# Altium PCB acqboard 3.0.PcbDoc (part 3 of 4)
Units mil, origin at the board's own origin, x right, y up, seen from the top; angles counter-clockwise.
Board outline 6000 x 4000 mil, 4 copper layers (Top Layer, Internal Plane 1, Internal Plane 2, Bottom Layer); 450 components, 328 nets, 1980 pads, 745 vias.
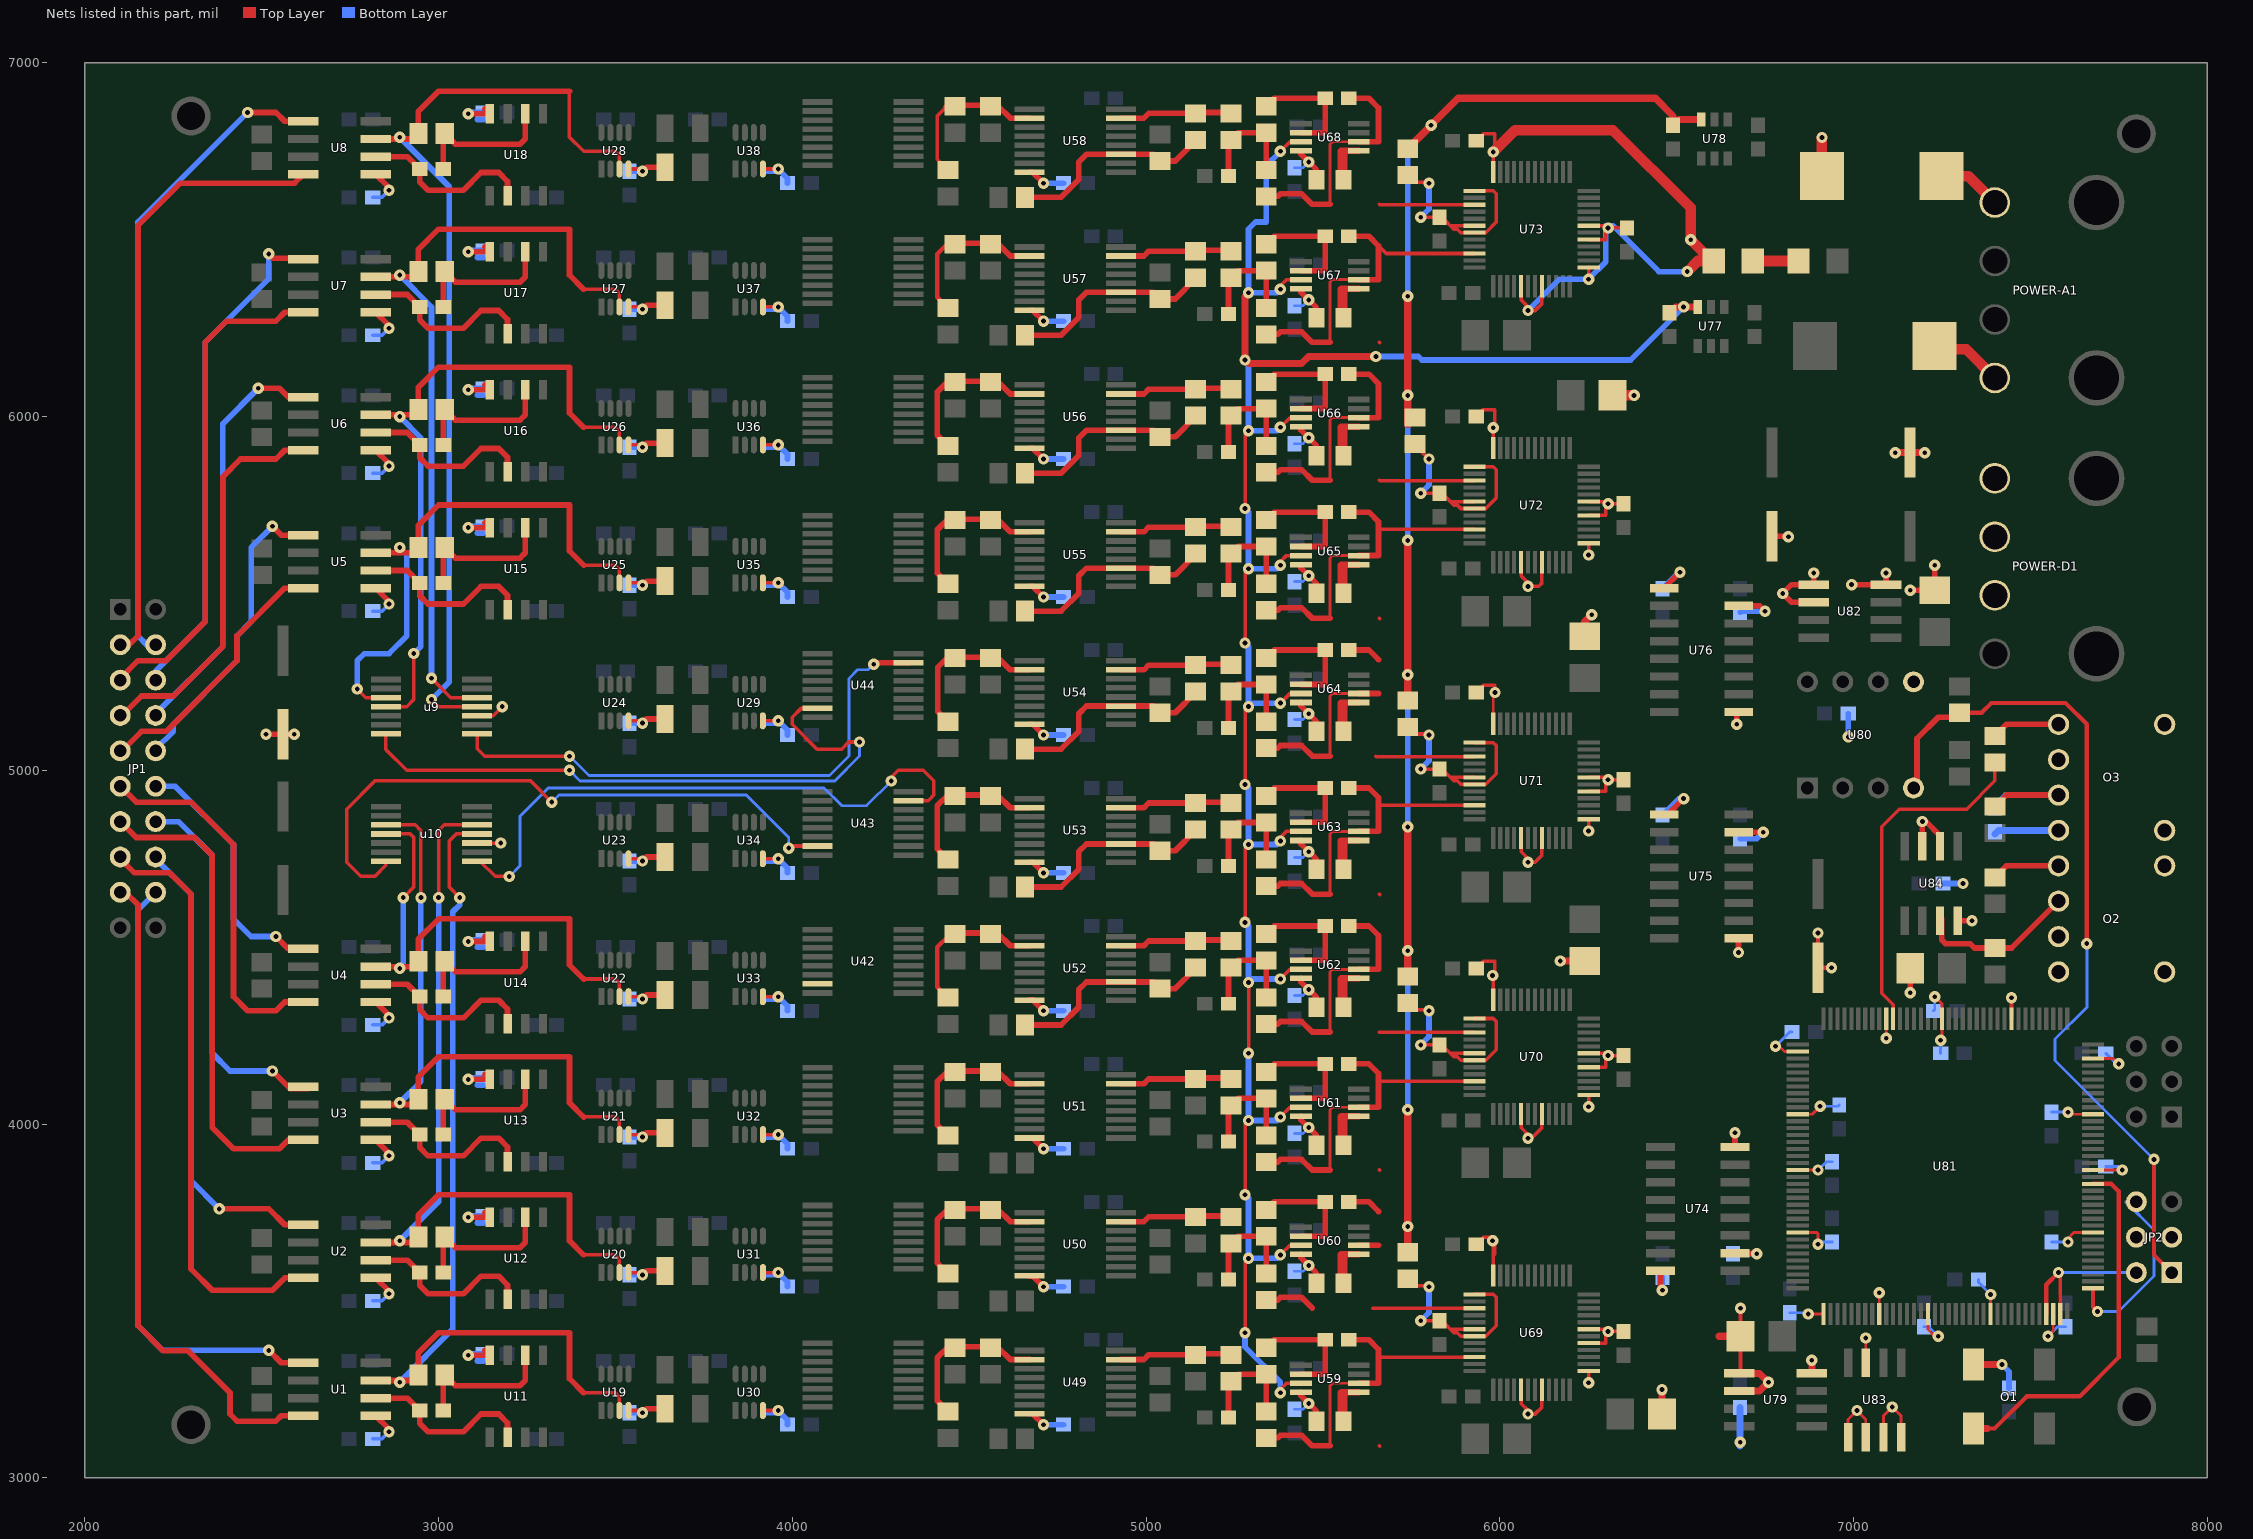
[diagram p5: the nets of this part, all layers, seen from the top]

## Via types
v1: diameter 32, hole 13.5, Top Layer to Bottom Layer, 745 vias

## Nets (pads, with @x,y where several pads share a name; then routed paths per layer and width w, separated by ;. In a path a pad name is that pad's centre, name@x,y a point inside that pad or via, vN(x,y) a via of type N, cw(c..) or ccw(c..) an arc to the next point about the centre after c; other vN are vias at no path point) (continued)
AVSS: C2.2 C11.2 C12.2 C13.2 C14.2 C15.2 C16.2 C17.2 C18.2 C19.2 C20.2 C41.2 C43.2 C45.2 C47.2 C49.2 C51.2 C53.2 C55.2 C57.2 C59.2 C100.1 C102.1 C104.1 C106.1 C108.1 C110.1 C112.1 C114.1 C116.1 C117.1 C118.1 C119.1 C120.1 C121.1 C122.1 C123.1 C142.2 C143.2 C144.2 C145.2 C146.2 C147.2 C148.2 C149.2 C150.2 C151.2 C162.1 C163.1 C164.1 C165.1 C166.1 C167.1 C168.1 C169.1 C170.1 C171.1 C172.2 C173.2 C174.2 C175.2 C176.2 C177.2 C178.2 C179.2 C180.2 C181.2 C192.2 C194.2 C196.2 C198.2 C200.2 C202.2 C204.2 C206.2 C208.2 C210.2 L3.2 U1.5 U2.5 U3.5 U4.5 U5.5 U6.5 U7.5 U8.5 u9.3 u10.3 U11.4 U12.4 U13.4 U14.4 U15.4 U16.4 U17.4 U18.4 U19.4 U20.4 U21.4 U22.4 U23.4 U24.4 U25.4 U26.4 U27.4 U28.4 U29.4 U30.4 U31.4 U32.4 U33.4 U34.4 U35.4 U36.4 U37.4 U38.4 U49.8 U50.8 U51.8 U52.8 U53.8 U54.8 U55.8 U56.8 U57.8 U58.8 U59.4 U60.4 U61.4 U62.4 U63.4 U64.4 U65.4 U66.4 U67.4 U68.4 | length 7779.1
  Top Layer w10: u10.3@3108.94,4794.41 v1(3175.59,4794.41) ; u9.3@3108.94,5154.41 3154.41,5154.41 v1(3180,5180) ; U19.4@3536.77,3190 3570,3190 v1(3576.54,3183.46) ; U20.4@3536.77,3580 3570,3580 v1(3576.54,3573.46) ; U21.4@3536.77,3970 3570,3970 v1(3576.54,3963.46) ; U22.4@3536.77,4360 3570,4360 v1(3576.54,4353.46) ; U23.4@3536.77,4750 3570,4750 v1(3576.54,4743.46) ; U24.4@3536.77,5140 3570,5140 v1(3576.54,5133.46) ; U25.4@3536.77,5530 3570,5530 v1(3576.54,5523.46) ; U26.4@3536.77,5920 3570,5920 v1(3576.54,5913.46) ; U27.4@3536.77,6310 3570,6310 v1(3576.54,6303.46) ; U28.4@3536.77,6700 3570,6700 v1(3576.54,6693.46) ; U30.4@3916.77,3190 v1(3960,3190) ; U31.4@3916.77,3580 v1(3960,3580) ; U32.4@3916.77,3970 v1(3960,3970) ; U33.4@3916.77,4360 v1(3960,4360) ; U34.4@3916.77,4750 v1(3960,4750) ; U29.4@3916.77,5140 v1(3960,5140) ; U35.4@3916.77,5530 v1(3960,5530) ; U36.4@3916.77,5920 v1(3960,5920) ; U37.4@3916.77,6310 v1(3960,6310) ; U38.4@3916.77,6700 v1(3960,6700)
  Top Layer w16: v1(2511.89,5101.89) v1(2591.89,5101.89) ; U1.5@2822.36,3175 2860,3137.36 v1(2860,3130) ; U2.5@2822.36,3565 2860,3527.36 v1(2860,3520) ; U3.5@2822.36,3955 2860,3917.36 v1(2860,3910) ; U4.5@2822.36,4345 2860,4307.36 v1(2860,4300) ; U5.5@2822.36,5515 2860,5477.36 v1(2860,5470) ; U6.5@2822.36,5905 2860,5867.36 v1(2860,5860) ; U7.5@2822.36,6295 2860,6257.36 v1(2860,6250) ; U8.5@2822.36,6685 2860,6647.36 v1(2860,6640) ; v1(3083.86,3346.14) U11.4@3145,3346.14 3131.14,3360 ; v1(3083.86,3736.14) U12.4@3145,3736.14 3131.14,3750 ; v1(3083.86,4126.14) U13.4@3145,4126.14 3131.14,4140 ; v1(3083.86,4516.14) U14.4@3145,4516.14 3131.14,4530 ; v1(3083.86,5686.14) U15.4@3145,5686.14 3131.14,5700 ; v1(3083.86,6076.14) U16.4@3145,6076.14 3131.14,6090 ; v1(3083.86,6466.14) U17.4@3145,6466.14 3131.14,6480 ; v1(3083.86,6856.14) U18.4@3145,6856.14 3131.14,6870 ; v1(3576.54,3183.46) 3587.95,3194.88 C11.2@3640,3194.88 ; v1(3576.54,3573.46) 3587.95,3584.88 C12.2@3640,3584.88 ; v1(3576.54,3963.46) 3587.95,3974.88 C13.2@3640,3974.88 ; v1(3576.54,4353.46) 3587.95,4364.88 C14.2@3640,4364.88 ; v1(3576.54,4743.46) 3587.95,4754.88 C15.2@3640,4754.88 ; v1(3576.54,5133.46) 3587.95,5144.88 C16.2@3640,5144.88 ; v1(3576.54,5523.46) 3587.95,5534.88 C17.2@3640,5534.88 ; v1(3576.54,5913.46) 3587.95,5924.88 C18.2@3640,5924.88 ; v1(3576.54,6303.46) 3587.95,6314.88 C19.2@3640,6314.88 ; v1(3576.54,6693.46) 3587.95,6704.88 C20.2@3640,6704.88 ; U49.8@4671.06,3180.43 4679.57,3180.43 v1(4710,3150) ; U50.8@4671.06,3570.43 4679.57,3570.43 v1(4710,3540) ; U51.8@4671.06,3960.43 4679.57,3960.43 v1(4710,3930) ; U52.8@4671.06,4350.43 4679.57,4350.43 v1(4710,4320) ; U53.8@4671.06,4740.43 4679.57,4740.43 v1(4710,4710) ; U54.8@4671.06,5130.43 4679.57,5130.43 v1(4710,5100) ; U55.8@4671.06,5520.43 4679.57,5520.43 v1(4710,5490) ; U56.8@4671.06,5910.43 4679.57,5910.43 v1(4710,5880) ; U57.8@4671.06,6300.43 4679.57,6300.43 v1(4710,6270) ; U58.8@4671.06,6690.43 4679.57,6690.43 v1(4710,6660) ; U59.4@5438.31,3241.61 5438.31,3231.69 5481.61,3188.39 C41.2@5481.61,3160 ; U60.4@5438.31,3631.61 5438.31,3621.69 5481.61,3578.39 C43.2@5481.61,3550 ; U61.4@5438.31,4021.61 5438.31,4011.69 5481.61,3968.39 C45.2@5481.61,3940 ; U62.4@5438.31,4411.61 5438.31,4401.69 5481.61,4358.39 C47.2@5481.61,4330 ; U63.4@5438.31,4801.61 5438.31,4791.69 5481.61,4748.39 C49.2@5481.61,4720 ; U64.4@5438.31,5191.61 5438.31,5181.69 5481.61,5138.39 C51.2@5481.61,5110 ; U65.4@5438.31,5581.61 5438.31,5571.69 5481.61,5528.39 C53.2@5481.61,5500 ; U66.4@5438.31,5971.61 5438.31,5961.69 5481.61,5918.39 C55.2@5481.61,5890 ; U67.4@5438.31,6361.61 5438.31,6351.69 5481.61,6308.39 C57.2@5481.61,6280 ; U68.4@5438.31,6751.61 5438.31,6741.69 5481.61,6698.39 C59.2@5481.61,6670
  Top Layer w30: L3.2@6911,6680 v1(6911,6789)
  Bottom Layer w8: C192.2@5420,3193.46 5443.46,3193.46 v1(5460,3210) ; C194.2@5420,3583.46 5443.46,3583.46 v1(5460,3600) ; C196.2@5420,3973.46 5443.46,3973.46 v1(5460,3990) ; C198.2@5420,4363.46 5443.46,4363.46 v1(5460,4380) ; C200.2@5420,4753.46 5443.46,4753.46 v1(5460,4770) ; C202.2@5420,5143.46 5443.46,5143.46 v1(5460,5160) ; C204.2@5420,5533.46 5443.46,5533.46 v1(5460,5550) ; C206.2@5420,5923.46 5443.46,5923.46 v1(5460,5940) ; C208.2@5420,6313.46 5443.46,6313.46 v1(5460,6330) ; C210.2@5420,6703.46 5443.46,6703.46 v1(5460,6720)
  Bottom Layer w10: C100.1@2813.46,3110 2840,3110 v1(2860,3130) ; C102.1@2813.46,3500 2840,3500 v1(2860,3520) ; C104.1@2813.46,3890 2840,3890 v1(2860,3910) ; C106.1@2813.46,4280 2840,4280 v1(2860,4300) ; C108.1@2813.46,5450 2840,5450 v1(2860,5470) ; C110.1@2813.46,5840 2840,5840 v1(2860,5860) ; C112.1@2813.46,6230 2840,6230 v1(2860,6250) ; C114.1@2813.46,6620 2840,6620 v1(2860,6640)
  Bottom Layer w16: v1(3083.86,3346.14) 3087.72,3350 C116.1@3126.54,3350 ; v1(3083.86,3736.14) 3087.72,3740 C117.1@3126.54,3740 ; v1(3083.86,4126.14) 3087.72,4130 C118.1@3126.54,4130 ; v1(3083.86,4516.14) 3087.72,4520 C119.1@3126.54,4520 ; v1(3083.86,5686.14) 3087.72,5690 C120.1@3126.54,5690 ; v1(3083.86,6076.14) 3087.72,6080 C121.1@3126.54,6080 ; v1(3083.86,6466.14) 3087.72,6470 C122.1@3126.54,6470 ; v1(3083.86,6856.14) 3087.72,6860 C123.1@3126.54,6860 ; 3110,3330 3126.54,3330 ; 3110,3720 3126.54,3720 ; 3110,4110 3126.54,4110 ; 3110,4500 3126.54,4500 ; 3110,5670 3126.54,5670 ; 3110,6060 3126.54,6060 ; 3110,6450 3126.54,6450 ; 3110,6840 3126.54,6840 ; C142.2@3540,3183.46 v1(3576.54,3183.46) ; C143.2@3540,3573.46 v1(3576.54,3573.46) ; C144.2@3540,3963.46 v1(3576.54,3963.46) ; C145.2@3540,4353.46 v1(3576.54,4353.46) ; C146.2@3540,4743.46 v1(3576.54,4743.46) ; C147.2@3540,5133.46 v1(3576.54,5133.46) ; C148.2@3540,5523.46 v1(3576.54,5523.46) ; C149.2@3540,5913.46 v1(3576.54,5913.46) ; C150.2@3540,6303.46 v1(3576.54,6303.46) ; C151.2@3540,6693.46 v1(3576.54,6693.46) ; 3920,3183.46 3953.46,3183.46 v1(3960,3190) 3986.54,3163.46 C162.1@3986.54,3150 ; 3920,3573.46 3953.46,3573.46 v1(3960,3580) 3986.54,3553.46 C163.1@3986.54,3540 ; 3920,3963.46 3953.46,3963.46 v1(3960,3970) 3986.54,3943.46 C164.1@3986.54,3930 ; 3920,4353.46 3953.46,4353.46 v1(3960,4360) 3986.54,4333.46 C165.1@3986.54,4320 ; 3920,4743.46 3953.46,4743.46 v1(3960,4750) 3986.54,4723.46 C166.1@3986.54,4710 ; 3920,5133.46 3953.46,5133.46 v1(3960,5140) 3986.54,5113.46 C167.1@3986.54,5100 ; 3920,5523.46 3953.46,5523.46 v1(3960,5530) 3986.54,5503.46 C168.1@3986.54,5490 ; 3920,5913.46 3953.46,5913.46 v1(3960,5920) 3986.54,5893.46 C169.1@3986.54,5880 ; 3920,6303.46 3953.46,6303.46 v1(3960,6310) 3986.54,6283.46 C170.1@3986.54,6270 ; 3920,6693.46 3953.46,6693.46 v1(3960,6700) 3986.54,6673.46 C171.1@3986.54,6660 ; v1(4710,3150) C172.2@4766.54,3150 ; v1(4710,3540) C173.2@4766.54,3540 ; v1(4710,3930) C174.2@4766.54,3930 ; v1(4710,4320) C175.2@4766.54,4320 ; v1(4710,4710) C176.2@4766.54,4710 ; v1(4710,5100) C177.2@4766.54,5100 ; v1(4710,5490) C178.2@4766.54,5490 ; v1(4710,5880) C179.2@4766.54,5880 ; v1(4710,6270) C180.2@4766.54,6270 ; v1(4710,6660) C181.2@4766.54,6660
DVDD: C68.1 C71.1 C74.1 C77.1 C80.1 C81.1 C82.1 C83.1 C84.1 C85.1 C86.1 C87.1 C88.1 C89.1 C212.2 C213.2 C214.1 R112.2 U69.5 U69.8 U69.13 U69.17 U69.19 U69.36 U70.5 U70.8 U70.13 U70.17 U70.19 U70.36 U71.5 U71.8 U71.13 U71.17 U71.19 U71.36 U72.5 U72.8 U72.13 U72.17 U72.19 U72.36 U73.5 U73.8 U73.13 U73.17 U73.19 U73.36 U74.16 U75.1 U76.1 | length 5088.3
  Top Layer w8: U71.36@5981.73,5131.42 5981.73,5215.2 v1(5986.54,5220)
  Top Layer w10: C68.1@5933.46,3660 5953.46,3680 5986.54,3680 5986.54,3633.07 5981.73,3628.27 ; C71.1@5933.46,4440 5953.46,4460 5986.54,4460 5986.54,4413.07 5981.73,4408.27 U70.36@5981.73,4351.42 ; C74.1@5933.46,5220 5953.46,5240 5986.54,5240 v1(5986.54,5220) ; C77.1@5933.46,6000 5953.46,6020 5986.54,6020 5986.54,5973.07 v1(5981.73,5968.27) U72.36@5981.73,5911.42 ; C80.1@5933.46,6780 5953.46,6800 5986.54,6800 5986.54,6753.07 v1(5981.73,6748.27) U73.36@5981.73,6691.42 ; v1(5980,3670) 5981.73,3668.27 U69.36@5981.73,3571.42 ; U69.5@6060.47,3248.58 6060.47,3209.53 6080,3190 v1(6080,3180) 6100,3180 6119.53,3199.53 U69.8@6119.53,3248.58 ; U70.5@6060.47,4028.58 6060.47,3989.53 6080,3970 v1(6080,3960) 6090,3960 6119.53,3989.53 U70.8@6119.53,4028.58 ; U71.5@6060.47,4808.58 6060.47,4769.53 6080,4750 v1(6080,4740) 6100,4740 6119.53,4759.53 U71.8@6119.53,4808.58 ; U72.5@6060.47,5588.58 6060.47,5549.53 6080,5530 v1(6080,5520) 6110,5520 6119.53,5529.53 U72.8@6119.53,5588.58 ; U73.5@6060.47,6368.58 6060.47,6329.53 v1@6080,6310 ; v1(6080,6300) 6100,6300 6119.53,6319.53 U73.8@6119.53,6368.58 ; v1(6251.42,3268.58) U69.13@6251.42,3301.73 ; U69.17@6251.42,3380.47 6299.53,3380.47 6300,3380.94 6300,3420 v1(6306.54,3413.46) C85.1@6340,3413.46 ; U69.19@6251.42,3419.84 v1@6299.84,3419.84 ; v1(6251.42,4048.58) U70.13@6251.42,4081.73 ; U70.17@6251.42,4160.47 6299.53,4160.47 6300,4160.94 6300,4200 v1(6306.54,4193.46) C86.1@6340,4193.46 ; U70.19@6251.42,4199.84 v1@6299.84,4199.84 ; v1(6251.42,4828.58) U71.13@6251.42,4861.73 ; U71.17@6251.42,4940.47 6299.53,4940.47 6300,4940.94 6300,4980 v1(6306.54,4973.46) C87.1@6340,4973.46 ; U71.19@6251.42,4979.84 v1@6299.84,4979.84 ; v1(6251.42,5608.58) U72.13@6251.42,5641.73 ; U72.17@6251.42,5720.47 6299.53,5720.47 6300,5720.94 6300,5760 v1(6306.54,5753.46) C88.1@6340,5753.46 ; U72.19@6251.42,5759.84 v1@6299.84,5759.84 ; v1(6251.42,6388.58) U73.13@6251.42,6421.73 ; U73.17@6251.42,6500.47 6299.53,6500.47 6300,6500.94 6300,6540 v1(6306.54,6533.46) 6340,6533.46 ; U73.19@6251.42,6539.84 v1@6299.84,6539.84
  Top Layer w16: U74.16@6454.69,3585 6454.69,3535.31 v1(6460,3530) ; U75.1@6464.68,4875 6475,4875 v1(6520,4920) ; U76.1@6464.68,5515 6465,5515 v1(6510,5560)
  Top Layer w20: v1(6080,6300) v1@6088.89,6300 ; v1(6170.94,4460.94) C81.1@6240,4460.94 ; C82.1@6229.06,5379.06 C82.1@6240,5379.06 6240,5420 v1(6260,5440) ; C84.1@6459.06,3180 v1(6459.06,3249.06)
  Top Layer w30: v1(5981.73,6748.27) 6043.46,6810 6320,6810 6540,6590 v1(6540,6500) R112.2@6600,6440 ; C83.1@6319.06,6060 v1(6380,6060) ; v1(6530,6410) 6560,6440 R112.2@6604.88,6440
  Bottom Layer w16: v1(6080,6300) 6168.58,6388.58 v1(6251.42,6388.58) 6300,6437.16 6300,6540 6320,6540 6450,6410 v1(6530,6410) ; v1(6460,3530) C212.2@6460,3566.54 ; C213.2@6460,4873.46 6506.54,4920 v1(6520,4920) ; C214.1@6460,5513.46 6506.54,5560 v1(6510,5560)
  other v1: 5980,4420
GND: C92.2 C93.2 C96.2 C97.2 C98.2 C99.2 C215.1 C216.2 C217.1 C218.1 C219.2 C220.2 C221.2 C222.2 C223.2 C224.2 C225.2 C226.2 C227.2 C228.2 C229.2 C230.2 C231.2 C232.2 C233.2 C234.2 C235.2 C236.2 JP2.3 JP2.4 O1.4 O2.3 O2.4 O2.5 O2.8 O3.2 O3.4 O3.5 O3.8 POWER-D1.1 POWER-D1.2 POWER-D1.3 U74.2 U74.8 U75.9 U75.15 U76.9 U76.15 U79.1 U79.2 U79.8 U80.5 U81.1 U81.9 U81.16 U81.25 U81.34 U81.45 U81.54 U81.62 U81.70 U81.81 U81.91 U81.99 U81.110 U81.119 U81.127 U81.136 U82.1 U82.2 U82.8 U83.1 U83.2 U83.3 U83.4 U83.7 U84.4 U84.6 U84.7 | length 4936.5
  Top Layer w8: v1(6780,4220) 6790,4220 6805.2,4204.8 U81.110@6842.68,4204.8 ; U81.136@6842.68,3692.99 6897.01,3692.99 6900,3690 v1(6900,3660) ; U81.127@6842.68,3870.16 v1(6900.16,3870.16) ; U81.119@6842.68,4027.64 6883.57,4027.64 v1(6905.93,4050) ; v1(6872.68,3462.68) U81.1@6915.51,3462.68 ; U83.1@6985,3114.69 6985,3165 v1(7010,3190) 7035,3165 U83.2@7035,3114.69 ; U83.7@7035,3325.32 v1(7035,3395) ; U81.9@7072.99,3462.68 v1(7072.99,3522.99) ; U83.3@7085,3114.69 7085,3175 v1(7110,3200) 7135,3175 U83.4@7135,3114.69 ; v1(7092.68,4242.68) U81.99@7092.68,4297.32 ; U81.16@7210.79,3462.68 7210.79,3419.21 7230,3400 v1(7240,3400) ; v1(7230,4360) 7250.16,4339.84 7250.16,4240.16 v1(7246.54,4236.54) ; U81.25@7387.95,3462.68 v1(7387.95,3517.95) ; v1(7550,3400) 7565.12,3415.12 U81.34@7565.12,3462.68 ; v1(7606.54,3666.54) 7606.54,3676.54 7622.99,3692.99 U81.45@7677.32,3692.99 ; v1(7606.54,4033.46) 7612.36,4027.64 U81.62@7677.32,4027.64 ; U81.54@7677.32,3870.16 7719.84,3870.16 7720,3870 v1(7760,3870) ; U81.70@7677.32,4185.12 7734.88,4185.12 v1(7750,4170)
  Top Layer w12: U79.1@6680.94,3298.31 v1(6680.94,3479.06) ; v1(6900,4540) C96.2@6900,4441.89 v1(6938.11,4441.89) ; U81.81@7447.01,4297.32 v1(7447.01,4357.01)
  Top Layer w16: U74.2@6665.32,3635 6725,3635 v1(6726.54,3633.46) ; U74.8@6665.32,3935 v1(6665.32,3975.32) ; v1(6670,5130) U76.9@6670,5160 ; v1(6675.31,4484.69) U75.9@6675.31,4525 ; U75.15@6675.31,4825 v1(6745,4825) ; U76.15@6675.31,5465 6735,5465 v1(6750,5450) ; C92.2@6770,5661.89 6818.11,5661.89 v1(6816.22,5660) ; U82.2@6887.64,5475 6825,5475 v1(6800,5500) 6825,5525 U82.1@6887.64,5525 v1(6887.64,5557.64) ; v1(6995,5525) U82.8@7092.36,5525 v1(7092.36,5557.64) ; v1(7160.94,4370.94) C98.2@7160.94,4440 ; v1(7160.94,5509.06) C99.2@7230,5509.06 v1(7230,5580) ; U84.7@7195,4785.32 v1(7195,4855) 7205,4855 7245,4815 U84.6@7245,4785.32 ; U84.4@7295,4574.69 v1(7335.31,4574.69)
  Top Layer w20: 6620,3400 C93.2@6680.94,3400 ; U79.2@6677.64,3245 6735,3245 v1(6760,3270) 6735,3295 U79.1@6677.64,3295 ; U79.8@6882.36,3295 v1(6882.36,3332.36) ; v1(7118.11,5898.11) v1(7201.89,5898.11) ; O1.4@7340,3320 v1(7420,3320)
  Bottom Layer w8: v1(6780,4220) 6820,4260 C220.2@6826.54,4260 ; C219.2@6820,3466.54 v1@6868.82,3466.54 ; v1(6882.36,3332.36) v1@6890,3340 ; v1(6900,3660) 6906.54,3666.54 C221.2@6940,3666.54 ; v1(6900.16,3870.16) 6923.46,3893.46 C222.2@6940,3893.46 ; v1(6905.93,4050) 6956.54,4050 C223.2@6960,4053.46 ; C225.2@7200,3426.54 7213.46,3426.54 v1(7240,3400) ; C226.2@7226.54,4320 7230,4323.46 v1(7230,4360) ; C229.2@7246.54,4200 v1(7246.54,4236.54) ; C228.2@7353.46,3560 7353.46,3552.44 v1(7387.95,3517.95) ; v1(7550,3400) 7576.54,3426.54 C234.2@7600,3426.54 ; C232.2@7560,3666.54 v1(7606.54,3666.54) v1@7606.54,3676.54 ; C233.2@7560,4033.46 v1(7606.54,4033.46) ; C235.2@7713.46,3880 7750,3880 v1(7760,3870) ; C236.2@7713.46,4200 7743.46,4170 v1(7750,4170)
  Bottom Layer w16: C215.1@6660,3633.46 v1(6726.54,3633.46) ; C217.1@6680,4806.54 6726.54,4806.54 v1(6745,4825) ; C218.1@6680,5446.54 6683.46,5450 v1(6750,5450) ; v1(6985.46,5094.54) C224.2@6985.46,5160 ; C227.2@7253.46,4680 v1(7310,4680) ; v1(7335.31,4574.69) v1@7340,4570 ; v1(7420,3320) 7440,3300 C230.2@7440,3253.46
  Bottom Layer w20: v1@6680,3090 C216.2@6680,3198.54 ; C231.2@7400,4820 7410,4830 O3.4@7580,4830
  other v1: 6680,3100
IN+1: JP1.4 U8.1 | length 1836.8
  Top Layer w16: v1(2460,6860) 2540,6860 2565,6835 U8.1@2617.64,6835
  Bottom Layer w16: JP1.4@2200,5355 2175,5355 2150,5380 2150,6550 v1(2460,6860)
IN+2: JP1.6 U7.1 | length 1437.2
  Top Layer w16: v1(2520,6460) 2532.01,6447.99 U7.1@2614.65,6447.99
  Bottom Layer w16: JP1.6@2200,5255 2200,5280 2340,5420 2340,6210 2520,6390 v1(2520,6460)
IN+3: JP1.8 U6.1 | length 1183.1
  Top Layer w16: v1(2490,6080) 2550,6080 2575,6055 U6.1@2617.64,6055
  Bottom Layer w16: JP1.8@2200,5155 2200,5160 2390,5350 2390,5980 v1(2490,6080)
IN+4: JP1.10 U5.1 | length 869.7
  Top Layer w16: v1(2530,5690) 2555,5665 U5.1@2617.64,5665
  Bottom Layer w16: JP1.10@2200,5055 2200,5060 2250,5110 2250,5130 2430,5310 2430,5380 2470,5420 2470,5630 v1(2530,5690)
IN+5: JP1.12 U4.1 | length 731.2
  Top Layer w16: v1(2540,4530) 2575,4495 U4.1@2617.64,4495
  Bottom Layer w16: JP1.12@2200,4955 2255,4955 2420,4790 2420,4580 2470,4530 v1(2540,4530)
IN+6: JP1.14 U3.1 | length 1070.8
  Top Layer w16: v1(2530,4150) 2580,4100 U3.1@2630,4100
  Bottom Layer w16: JP1.14@2200,4855 2265,4855 2360,4760 2360,4200 2410,4150 v1(2530,4150)
IN+7: JP1.16 U2.1 | length 1325.8
  Top Layer w16: v1(2380,3760) 2520,3760 2565,3715 U2.1@2617.64,3715
  Bottom Layer w16: JP1.16@2200,4755 2200,4750 2300,4650 2300,3840 v1(2380,3760)
IN+8: JP1.18 U1.1 | length 1756.8
  Top Layer w16: v1(2520,3360) 2555,3325 U1.1@2617.64,3325
  Bottom Layer w16: JP1.18@2200,4655 2150,4605 2150,3430 2220,3360 v1(2520,3360)
IN-1: JP1.3 U8.4 | length 1748.1
  Top Layer w16: JP1.3@2100,5355 2125,5355 2150,5380 2150,6540 2270,6660 2592.64,6660 U8.4@2617.64,6685
IN-2: JP1.5 U7.4 | length 1414.1
  Top Layer w16: JP1.5@2100,5255 2100,5260 2150,5310 2230,5310 2340,5420 2340,6210 2400,6270 2540,6270 2565,6295 U7.4@2617.64,6295
IN-3: JP1.7 U6.4 | length 1109.5
  Top Layer w16: JP1.7@2100,5155 2105,5155 2160,5210 2250,5210 2390,5350 2390,5830 2440,5880 2540,5880 2565,5905 U6.4@2617.64,5905
IN-4: JP1.9 U5.4 | length 749.2
  Top Layer w16: JP1.9@2100,5055 2105,5055 2160,5110 2230,5110 2430,5310 2430,5380 2565,5515 U5.4@2617.64,5515
IN-5: JP1.11 U4.4 | length 1042.9
  Top Layer w16: JP1.11@2100,4955 2145,4910 2300,4910 2420,4790 2420,4360 2460,4320 2540,4320 2565,4345 U4.4@2617.64,4345
IN-6: JP1.13 U3.4 | length 1362.2
  Top Layer w16: JP1.13@2100,4855 2145,4810 2310,4810 2360,4760 2360,3990 2420,3930 2550,3930 2575,3955 U3.4@2617.64,3955
IN-7: JP1.15 U2.4 | length 1663.4
  Top Layer w16: JP1.15@2100,4755 2100,4750 2140,4710 2240,4710 2300,4650 2300,3590 2360,3530 2530,3530 2565,3565 U2.4@2617.64,3565
IN-8: JP1.17 U1.4 | length 1875.3
  Top Layer w16: JP1.17@2100,4655 2115,4655 2150,4620 2150,3430 2221.14,3358.86 2291.14,3358.86 2410,3240 2410,3180 2430,3160 2540,3160 2555,3175 U1.4@2617.64,3175
INAOUT1: R16.1 U8.7 u9.4 U28.3 | length 2777.3
  Top Layer w10: R16.1@2935.27,6792.67 R16.1@2942.6,6800 ; v1(2980,5200) 3000,5180 u9.4@3108.94,5180 ; 3370,6920 3370,6790 3410,6750 3500,6750 3511.18,6738.82 U28.3@3511.18,6700
  Top Layer w16: U8.7@2822.36,6785 2927.6,6785 R16.1@2935.27,6792.67 ; R16.1@2942.6,6800 2942.6,6862.6 3000,6920 3370,6920
  Bottom Layer w16: v1(2890,6790) 3030,6650 3030,5250 v1(2980,5200)
INAOUT2: R15.1 U7.7 u9.5 U27.3 | length 2300.2
  Top Layer w10: R15.1@2935.27,6402.67 R15.1@2942.6,6410 ; v1(2980,5260) 3034.41,5205.59 u9.5@3108.94,5205.59 ; 3410,6360 3500,6360 3511.18,6348.82 U27.3@3511.18,6310
  Top Layer w16: U7.7@2822.36,6395 2927.6,6395 R15.1@2935.27,6402.67 ; R15.1@2942.6,6410 2942.6,6472.6 3000,6530 3370,6530 3370,6400 3410,6360
  Bottom Layer w16: v1(2890,6400) 2980,6310 v1(2980,5260)
INAOUT3: R14.1 U6.7 u9.11 U26.3 | length 1891.8
  Top Layer w10: u9.11@2851.06,5180 2910,5180 2930,5200 v1(2930,5330) ; R14.1@2935.27,6012.67 R14.1@2942.6,6020 ; 3410,5970 3500,5970 3511.18,5958.82 U26.3@3511.18,5920
  Top Layer w16: U6.7@2822.36,6005 2927.6,6005 R14.1@2935.27,6012.67 ; R14.1@2942.6,6020 2942.6,6082.6 3000,6140 3370,6140 3370,6010 3410,5970
  Bottom Layer w16: v1(2890,6000) 2950,5940 2950,5350 v1(2930,5330)
INAOUT4: R13.1 U5.7 u9.10 U25.3 | length 1584.9
  Top Layer w10: v1(2770,5230) 2794.41,5205.59 u9.10@2851.06,5205.59 ; v1@2890,5615 v1(2890,5630) ; R13.1@2935.27,5622.67 R13.1@2942.6,5630 ; 3410,5580 3500,5580 3511.18,5568.82 U25.3@3511.18,5530
  Top Layer w16: U5.7@2822.36,5615 2927.6,5615 R13.1@2935.27,5622.67 ; R13.1@2942.6,5630 2942.6,5692.6 3000,5750 3370,5750 3370,5620 3410,5580
  Bottom Layer w16: v1(2770,5230) 2770,5310 2790,5330 2860,5330 2910,5380 2910,5610 v1(2890,5630)
INAOUT7: R12.1 U4.7 u10.11 U22.3 | length 1441.1
  Top Layer w10: u10.11@2851.06,4820 2920,4820 2930,4810 2930,4670 v1(2900,4640) ; R12.1@2935.27,4452.67 R12.1@2942.6,4460 ; 3410,4410 3500,4410 3511.18,4398.82 U22.3@3511.18,4360
  Top Layer w16: U4.7@2822.36,4445 2927.6,4445 R12.1@2935.27,4452.67 ; R12.1@2942.6,4460 2942.6,4522.6 3000,4580 3370,4580 3370,4450 3410,4410
  Bottom Layer w16: v1(2890,4440) 2900,4450 v1(2900,4640)
INAOUT8: R11.1 U3.7 u10.10 U21.3 | length 1871.7
  Top Layer w10: u10.10@2851.06,4845.59 2934.41,4845.59 2950,4830 v1(2950,4640) ; R11.1@2935.27,4062.67 R11.1@2942.6,4070 ; 3410,4020 3500,4020 3511.18,4008.82 U21.3@3511.18,3970
  Top Layer w16: U3.7@2822.36,4055 2927.6,4055 R11.1@2935.27,4062.67 ; R11.1@2942.6,4070 2942.6,4132.6 3000,4190 3370,4190 3370,4060 3410,4020
  Bottom Layer w16: v1(2890,4060) 2950,4120 v1(2950,4640)
INAOUT9: R10.1 U2.7 u10.5 U20.3 | length 2297.4
  Top Layer w10: v1@2890,3665 v1(2890,3670) ; R10.1@2935.27,3672.67 R10.1@2942.6,3680 ; v1(3000,4640) 3000,4830 3015.59,4845.59 u10.5@3108.94,4845.59 ; 3410,3630 3500,3630 3511.18,3618.82 U20.3@3511.18,3580
  Top Layer w16: U2.7@2822.36,3665 2927.6,3665 R10.1@2935.27,3672.67 ; R10.1@2942.6,3680 2942.6,3742.6 3000,3800 3370,3800 3370,3670 3410,3630
  Bottom Layer w16: v1(2890,3670) 3000,3780 v1(3000,4640)
INAOUT10: R9.1 U1.7 u10.4 U19.3 | length 2671.5
  Top Layer w10: R9.1@2935.27,3282.67 R9.1@2942.6,3290 ; v1(3060,4640) 3030,4670 3030,4800 3050,4820 u10.4@3108.94,4820 ; 3410,3240 3500,3240 3511.18,3228.82 U19.3@3511.18,3190
  Top Layer w16: U1.7@2822.36,3275 2927.6,3275 R9.1@2935.27,3282.67 ; R9.1@2942.6,3290 2942.6,3352.6 3000,3410 3370,3410 3370,3280 3410,3240
  Bottom Layer w16: v1(2890,3270) 3040,3420 3040,4600 3060,4620 v1(3060,4640)
INMUXA5: u9.1 U44.15 | length 1554.7
  Top Layer w10: u9.1@3108.94,5103.23 3108.94,5061.06 3130,5040 v1(3370,5040)
  Top Layer w16: v1(4230,5300) 4233.98,5303.98 U44.15@4328.94,5303.98
  Bottom Layer w8: v1(3370,5040) 3425,4985 4105,4985 4160,5040 4160,5260 4184.27,5284.27 4214.27,5284.27 v1(4230,5300)
INMUXA6: u10.1 U43.15 | length 1692.6
  Top Layer w10: u10.1@3108.94,4743.23 3116.77,4743.23 3160,4700 v1(3200,4700) ; v1(4280,4970) 4280,4980 4300,5000 4370,5000 4400,4970 4400,4930 4383.98,4913.98 U43.15@4328.94,4913.98
  Bottom Layer w8: v1(3200,4700) 3230,4730 3230,4870 3310,4950 4090,4950 4140,4900 4210,4900 v1(4280,4970)
INMUXB5: u9.14 U44.7 | length 1818.2
  Top Layer w10: u9.14@2851.06,5103.23 2851.06,5058.94 2910,5000 v1(3370,5000) ; U44.7@4071.06,5176.02 4026.02,5176.02 4000,5150 4000,5130 4070,5060 4140,5060 4160,5080 v1(4190,5080)
  Bottom Layer w8: v1(3370,5000) 3400,4970 4120,4970 4190,5040 v1(4190,5080)
INMUXB6: u10.14 U43.7 | length 1782.2
  Top Layer w10: u10.14@2851.06,4743.23 2851.06,4731.06 2820,4700 2780,4700 2740,4740 2740,4890 2820,4970 3260,4970 v1(3320,4910) ; v1(3990,4780) 3996.02,4786.02 U43.7@4071.06,4786.02
  Bottom Layer w8: v1(3320,4910) 3340,4930 3870,4930 3990,4810 v1(3990,4780)
INMUXB7: U42.7
NetC2.ADC1_2: C65.2 R110.1 U73.37 U73.42 U73.43 | length 612.9
  Top Layer w10: R110.1@5740,6662.6 5797.4,6662.6 v1(5800,6660) ; v1(5776.54,6563.46) C65.2@5830,6563.46 ; C65.2@5840,6560 5870,6530 5880,6530 5889.84,6520.16 5960.16,6520.16 5990,6550 5990,6630 5981.73,6638.27 U73.37@5928.58,6638.27 ; 5860.16,6539.84 U73.42@5928.58,6539.84
  Bottom Layer w16: v1(5776.54,6563.46) 5800,6586.93 v1(5800,6660)
NetC2.ADC2_2: C64.2 R111.1 U72.37 U72.42 U72.43 | length 611
  Top Layer w10: R111.1@5760,5922.6 5760,5920 v1(5800,5880) ; v1(5776.54,5783.46) C64.2@5830,5783.46 ; C64.2@5840,5780 5870,5750 5880,5750 5889.84,5740.16 5960.16,5740.16 5990,5770 5990,5850 5981.73,5858.27 U72.37@5928.58,5858.27 ; 5860.16,5759.84 U72.42@5928.58,5759.84
  Bottom Layer w16: v1(5776.54,5783.46) 5800,5806.93 v1(5800,5880)
NetC2.ADC3_2: C63.2 R109.1 U71.37 U71.42 U71.43 | length 612.9
  Top Layer w10: R109.1@5740,5102.6 5797.4,5102.6 v1(5800,5100) ; v1(5776.54,5003.46) C63.2@5830,5003.46 ; C63.2@5840,5000 5870,4970 5880,4970 5889.84,4960.16 5960.16,4960.16 5990,4990 5990,5070 5981.73,5078.27 U71.37@5928.58,5078.27 ; 5860.16,4979.84 U71.42@5928.58,4979.84
  Bottom Layer w16: v1(5776.54,5003.46) 5800,5026.93 v1(5800,5100)
NetC2.ADC4_2: C62.2 R108.1 U70.37 U70.42 U70.43 | length 612.9
  Top Layer w10: R108.1@5740,4322.6 5797.4,4322.6 v1(5800,4320) ; v1(5776.54,4223.46) C62.2@5830,4223.46 ; C62.2@5840,4220 5870,4190 5880,4190 5889.84,4180.16 5960.16,4180.16 5990,4210 5990,4290 5981.73,4298.27 U70.37@5928.58,4298.27 ; 5860.16,4199.84 U70.42@5928.58,4199.84
  Bottom Layer w16: v1(5776.54,4223.46) 5800,4246.93 v1(5800,4320)
NetC2.ADC5_2: C61.2 R107.1 U69.37 U69.42 U69.43 | length 612.9
  Top Layer w10: R107.1@5740,3542.6 5797.4,3542.6 v1(5800,3540) ; v1(5776.54,3443.46) C61.2@5830,3443.46 ; C61.2@5840,3440 5870,3410 5880,3410 5889.84,3400.16 5960.16,3400.16 5990,3430 5990,3510 5981.73,3518.27 U69.37@5928.58,3518.27 ; 5860.16,3419.84 U69.42@5928.58,3419.84
  Bottom Layer w16: v1(5776.54,3443.46) 5800,3466.93 v1(5800,3540)
NetC29_1: C231.1 O3.3 R117.2 | length 399.9
  Top Layer w16: R117.2@7400,4890 R117.2@7400,4897.4 7432.6,4930 O3.3@7580,4930
  Bottom Layer w16: C231.1@7400,4893.46 7400,4900 7430,4930 O3.3@7580,4930
NetC42.AA1_1: C60.1 R105.2 U68.6 U73.39 | length 965.3
  Top Layer w8: 5520,6600 5520,6770 5527.2,6777.2 U68.6@5601.69,6777.2
  Top Layer w10: 5660,6600 5661.1,6598.9 U73.39@5928.58,6598.9
  Top Layer w16: R105.2@5340,6622.6 5372.6,6622.6 5380,6630 5440,6630 5470,6600 5520,6600 ; C60.1@5573.46,6900 5630,6900 5657.2,6872.8 5657.2,6777.2 U68.6@5601.69,6777.2
NetC42.AA1_2: C60.2 R106.2 U68.2 | length 339.1
  Top Layer w16: R106.2@5340,6877.4 5362.6,6900 C60.2@5506.54,6900 5506.54,6806.54 5502.8,6802.8 U68.2@5438.31,6802.8
NetC42.AA2_1: C58.1 R103.2 U67.6 U73.46 | length 993.9
  Top Layer w8: 5520,6210 5520,6380 5527.2,6387.2 U67.6@5601.69,6387.2
  Top Layer w10: 5646.12,6493.88 5678.9,6461.1 U73.46@5928.58,6461.1 ; 5660,6210 5661.1,6208.9
  Top Layer w16: R103.2@5340,6232.6 5372.6,6232.6 5380,6240 5440,6240 5470,6210 5520,6210 ; C58.1@5573.46,6510 5630,6510 5657.2,6482.8 5657.2,6387.2 U67.6@5601.69,6387.2
NetC42.AA2_2: C58.2 R104.2 U67.2 | length 339.1
  Top Layer w16: R104.2@5340,6487.4 5362.6,6510 C58.2@5506.54,6510 5506.54,6416.54 5502.8,6412.8 U67.2@5438.31,6412.8
NetC42.AA3_1: C56.1 R101.2 U66.6 U72.39 | length 965.3
  Top Layer w8: 5520,5820 5520,5990 5527.2,5997.2 U66.6@5601.69,5997.2
  Top Layer w10: 5660,5820 5661.1,5818.9 U72.39@5928.58,5818.9
  Top Layer w16: R101.2@5340,5842.6 5372.6,5842.6 5380,5850 5440,5850 5470,5820 5520,5820 ; C56.1@5573.46,6120 5630,6120 5657.2,6092.8 5657.2,5997.2 U66.6@5601.69,5997.2
NetC42.AA3_2: C56.2 R102.2 U66.2 | length 339.1
  Top Layer w16: R102.2@5340,6097.4 5362.6,6120 C56.2@5506.54,6120 5506.54,6026.54 5502.8,6022.8 U66.2@5438.31,6022.8
NetC42.AA4_1: C54.1 R99.2 U65.6 U72.46 | length 969.7
  Top Layer w8: 5520,5430 5520,5600 5527.2,5607.2 U65.6@5601.69,5607.2
  Top Layer w10: 5657.2,5680 5658.31,5681.1 U72.46@5928.58,5681.1 ; 5660,5430 5661.1,5428.9
  Top Layer w16: R99.2@5340,5452.6 5372.6,5452.6 5380,5460 5440,5460 5470,5430 5520,5430 ; C54.1@5573.46,5730 5630,5730 5657.2,5702.8 5657.2,5607.2 U65.6@5601.69,5607.2
NetC42.AA4_2: C54.2 R100.2 U65.2 | length 339.1
  Top Layer w16: R100.2@5340,5707.4 5362.6,5730 C54.2@5506.54,5730 5506.54,5636.54 5502.8,5632.8 U65.2@5438.31,5632.8
NetC42.AA5_1: C52.1 R97.2 U64.6 U71.39 | length 879.7
  Top Layer w8: 5520,5040 5520,5210 5527.2,5217.2 U64.6@5601.69,5217.2
  Top Layer w10: 5650,5040 5651.1,5038.9 U71.39@5928.58,5038.9
  Top Layer w16: R97.2@5340,5062.6 5372.6,5062.6 5380,5070 5440,5070 5470,5040 5520,5040 ; C52.1@5573.46,5340 5630,5340 5657.2,5312.8 ; U64.6@5601.69,5217.2 5657.2,5217.2
NetC42.AA5_2: C52.2 R98.2 U64.2 | length 339.1
  Top Layer w16: R98.2@5340,5317.4 5362.6,5340 C52.2@5506.54,5340 5506.54,5246.54 5502.8,5242.8 U64.2@5438.31,5242.8
NetC42.AA6_1: C50.1 R95.2 U63.6 U71.46 | length 969.7
  Top Layer w8: 5520,4650 5520,4820 5527.2,4827.2 U63.6@5601.69,4827.2
  Top Layer w10: 5657.2,4900 5658.31,4901.1 U71.46@5928.58,4901.1 ; 5660,4650 5661.1,4648.9
  Top Layer w16: R95.2@5340,4672.6 5372.6,4672.6 5380,4680 5440,4680 5470,4650 5520,4650 ; C50.1@5573.46,4950 5630,4950 5657.2,4922.8 5657.2,4827.2 U63.6@5601.69,4827.2
NetC42.AA6_2: C50.2 R96.2 U63.2 | length 339.1
  Top Layer w16: R96.2@5340,4927.4 5362.6,4950 C50.2@5506.54,4950 5506.54,4856.54 5502.8,4852.8 U63.2@5438.31,4852.8
NetC42.AA7_1: C48.1 R93.2 U62.6 U70.39 | length 965.3
  Top Layer w8: 5520,4260 5520,4430 5527.2,4437.2 U62.6@5601.69,4437.2
  Top Layer w10: 5660,4260 5661.1,4258.9 U70.39@5928.58,4258.9
  Top Layer w16: R93.2@5340,4282.6 5372.6,4282.6 5380,4290 5440,4290 5470,4260 5520,4260 ; C48.1@5573.46,4560 5630,4560 5657.2,4532.8 5657.2,4437.2 U62.6@5601.69,4437.2
NetC42.AA7_2: C48.2 R94.2 U62.2 | length 339.1
  Top Layer w16: R94.2@5340,4537.4 5362.6,4560 C48.2@5506.54,4560 5506.54,4466.54 5502.8,4462.8 U62.2@5438.31,4462.8
NetC42.AA8_1: C46.1 R91.2 U61.6 U70.46 | length 969.7
  Top Layer w8: 5520,3870 5520,4040 5527.2,4047.2 U61.6@5601.69,4047.2
  Top Layer w10: 5657.2,4120 5658.31,4121.1 U70.46@5928.58,4121.1 ; 5660,3870 5661.1,3868.9
  Top Layer w16: R91.2@5340,3892.6 5372.6,3892.6 5380,3900 5440,3900 5470,3870 5520,3870 ; C46.1@5573.46,4170 5630,4170 5657.2,4142.8 5657.2,4047.2 U61.6@5601.69,4047.2
NetC42.AA8_2: C46.2 R92.2 U61.2 | length 339.1
  Top Layer w16: R92.2@5340,4147.4 5362.6,4170 C46.2@5506.54,4170 5506.54,4076.54 5502.8,4072.8 U61.2@5438.31,4072.8
NetC42.AA9_1: C44.1 R89.2 U60.6 U69.39 | length 583.5
  Top Layer w10: 5641.1,3478.9 U69.39@5928.58,3478.9
  Top Layer w16: R89.2@5340,3502.6 5372.6,3502.6 5380,3510 5440,3510 5470,3480 ; C44.1@5573.46,3780 5630,3780 5657.2,3752.8 ; U60.6@5601.69,3657.2 5657.2,3657.2
NetC42.AA9_2: C44.2 R90.2 U60.2 | length 339.1
  Top Layer w16: R90.2@5340,3757.4 5362.6,3780 C44.2@5506.54,3780 5506.54,3686.54 5502.8,3682.8 U60.2@5438.31,3682.8
NetC42.AA10_1: C42.1 R87.2 U59.6 U69.46 | length 968.1
  Top Layer w8: 5520,3090 5520,3260 5527.2,3267.2 U59.6@5601.69,3267.2
  Top Layer w10: 5658.31,3341.1 U69.46@5928.58,3341.1 ; 5660,3090 5661.1,3088.9
  Top Layer w16: R87.2@5340,3112.6 5372.6,3112.6 5380,3120 5440,3120 5470,3090 5520,3090 ; C42.1@5573.46,3390 5630,3390 5657.2,3362.8 5657.2,3267.2 U59.6@5601.69,3267.2
NetC42.AA10_2: C42.2 R88.2 U59.2 | length 339.1
  Top Layer w16: R88.2@5340,3367.4 5362.6,3390 C42.2@5506.54,3390 5506.54,3296.54 5502.8,3292.8 U59.2@5438.31,3292.8
NetC44.AA1_2: C40.2 R86.2 R105.1 R106.1 | length 318.8
  Top Layer w16: C40.2@5233.46,6680 5233.46,6776.06 5260,6802.6 R106.1@5340,6802.6 R105.1@5340,6697.4
NetC44.AA2_2: C39.2 R85.2 R103.1 R104.1 | length 318.8
  Top Layer w16: C39.2@5233.46,6290 5233.46,6386.06 5260,6412.6 R104.1@5340,6412.6 R103.1@5340,6307.4
NetC44.AA3_2: C38.2 R84.2 R101.1 R102.1 | length 318.8
  Top Layer w16: C38.2@5233.46,5900 5233.46,5996.06 5260,6022.6 R102.1@5340,6022.6 R101.1@5340,5917.4
NetC44.AA4_2: C37.2 R83.2 R99.1 R100.1 | length 318.8
  Top Layer w16: C37.2@5233.46,5510 5233.46,5606.06 5260,5632.6 R100.1@5340,5632.6 R99.1@5340,5527.4
NetC44.AA5_2: C36.2 R82.2 R97.1 R98.1 | length 318.8
  Top Layer w16: C36.2@5233.46,5120 5233.46,5216.06 5260,5242.6 R98.1@5340,5242.6 R97.1@5340,5137.4
NetC44.AA6_2: C35.2 R81.2 R95.1 R96.1 | length 318.8
  Top Layer w16: C35.2@5233.46,4730 5233.46,4826.06 5260,4852.6 R96.1@5340,4852.6 R95.1@5340,4747.4
NetC44.AA7_2: C34.2 R80.2 R93.1 R94.1 | length 318.8
  Top Layer w16: C34.2@5233.46,4340 5233.46,4436.06 5260,4462.6 R94.1@5340,4462.6 R93.1@5340,4357.4
NetC44.AA8_2: C33.2 R79.2 R91.1 R92.1 | length 318.8
  Top Layer w16: C33.2@5233.46,3950 5233.46,4046.06 5260,4072.6 R92.1@5340,4072.6 R91.1@5340,3967.4
NetC44.AA9_2: C32.2 R78.2 R89.1 R90.1 | length 318.8
  Top Layer w16: C32.2@5233.46,3560 5233.46,3656.06 5260,3682.6 R90.1@5340,3682.6 R89.1@5340,3577.4
NetC44.AA10_2: C31.2 R77.2 R87.1 R88.1 | length 318.8
  Top Layer w16: C31.2@5233.46,3170 5233.46,3266.06 5260,3292.6 R88.1@5340,3292.6 R87.1@5340,3187.4
NetC47.AA1_1: C59.1 U68.5 | length 206.5
  Top Layer w18: 5560,6740 5560,6680 5550,6670 5550,6750 5551.61,6751.61 U68.5@5601.69,6751.61
NetC47.AA2_1: C57.1 U67.5 | length 206.5
  Top Layer w18: 5560,6350 5560,6290 5550,6280 5550,6360 5551.61,6361.61 U67.5@5601.69,6361.61
NetC47.AA3_1: C55.1 U66.5 | length 206.5
  Top Layer w18: 5560,5960 5560,5900 5550,5890 5550,5970 5551.61,5971.61 U66.5@5601.69,5971.61
NetC47.AA4_1: C53.1 U65.5 | length 206.5
  Top Layer w18: 5560,5570 5560,5510 5550,5500 5550,5580 5551.61,5581.61 U65.5@5601.69,5581.61
NetC47.AA5_1: C51.1 U64.5 | length 206.5
  Top Layer w18: 5560,5180 5560,5120 5550,5110 5550,5190 5551.61,5191.61 U64.5@5601.69,5191.61
NetC47.AA6_1: C49.1 U63.5 | length 206.5
  Top Layer w18: 5560,4790 5560,4730 5550,4720 5550,4800 5551.61,4801.61 U63.5@5601.69,4801.61
NetC47.AA7_1: C47.1 U62.5 | length 206.5
  Top Layer w18: 5560,4400 5560,4340 5550,4330 5550,4410 5551.61,4411.61 U62.5@5601.69,4411.61
NetC47.AA8_1: C45.1 U61.5 | length 206.5
  Top Layer w18: 5560,4010 5560,3950 5550,3940 5550,4020 5551.61,4021.61 U61.5@5601.69,4021.61
NetC47.AA9_1: C43.1 U60.5 | length 206.5
  Top Layer w18: 5560,3620 5560,3560 5550,3550 5550,3630 5551.61,3631.61 U60.5@5601.69,3631.61
NetC47.AA10_1: C41.1 U59.5 | length 206.5
  Top Layer w18: 5560,3230 5560,3170 5550,3160 5550,3240 5551.61,3241.61 U59.5@5601.69,3241.61
NetC50.IN1_1: C10.1 U8.6 U18.6 | length 505.6
  Top Layer w10: U8.6@2822.36,6735 U8.6@2850,6735
  Top Layer w16: U8.6@2850,6735 2911.54,6735 C10.1@2946.54,6700 2946.54,6663.46 2970,6640 3070,6640 3120,6690 3170,6690 3195,6665 U18.6@3195,6623.86
NetC50.IN1_2: C10.2 R16.2 U18.2 | length 417.4
  Top Layer w10: R16.2@3017.4,6796.06 R16.2@3017.4,6800
  Top Layer w16: C10.2@3013.46,6700 R16.2@3013.46,6796.06 ; R16.2@3017.4,6800 3047.4,6770 3230,6770 3245,6785 U18.2@3245,6856.14
NetC50.IN2_1: C9.1 U7.6 U17.6 | length 505.6
  Top Layer w10: U7.6@2822.36,6345 U7.6@2850,6345
  Top Layer w16: U7.6@2850,6345 2911.54,6345 C9.1@2946.54,6310 2946.54,6273.46 2970,6250 3070,6250 3120,6300 3170,6300 3195,6275 U17.6@3195,6233.86
NetC50.IN2_2: C9.2 R15.2 U17.2 | length 417.4
  Top Layer w10: R15.2@3017.4,6406.06 R15.2@3017.4,6410
  Top Layer w16: C9.2@3013.46,6310 R15.2@3013.46,6406.06 ; R15.2@3017.4,6410 3047.4,6380 3230,6380 3245,6395 U17.2@3245,6466.14
NetC50.IN3_1: C8.1 U6.6 U16.6 | length 505.6
  Top Layer w10: U6.6@2822.36,5955 U6.6@2850,5955
  Top Layer w16: U6.6@2850,5955 2911.54,5955 C8.1@2946.54,5920 2946.54,5883.46 2970,5860 3070,5860 3120,5910 3170,5910 3195,5885 U16.6@3195,5843.86
NetC50.IN3_2: C8.2 R14.2 U16.2 | length 417.4
  Top Layer w10: R14.2@3017.4,6016.06 R14.2@3017.4,6020
  Top Layer w16: C8.2@3013.46,5920 R14.2@3013.46,6016.06 ; R14.2@3017.4,6020 3047.4,5990 3230,5990 3245,6005 U16.2@3245,6076.14
NetC50.IN4_1: C7.1 U5.6 U15.6 | length 505.6
  Top Layer w10: U5.6@2822.36,5565 U5.6@2850,5565
  Top Layer w16: U5.6@2850,5565 2911.54,5565 C7.1@2946.54,5530 2946.54,5493.46 2970,5470 3070,5470 3120,5520 3170,5520 3195,5495 U15.6@3195,5453.86
NetC50.IN4_2: C7.2 R13.2 U15.2 | length 417.4
  Top Layer w10: R13.2@3017.4,5626.06 R13.2@3017.4,5630
  Top Layer w16: C7.2@3013.46,5530 R13.2@3013.46,5626.06 ; R13.2@3017.4,5630 3047.4,5600 3230,5600 3245,5615 U15.2@3245,5686.14
NetC50.IN5_1: C6.1 U4.6 U14.6 | length 505.6
  Top Layer w10: U4.6@2822.36,4395 U4.6@2850,4395
  Top Layer w16: U4.6@2850,4395 2911.54,4395 C6.1@2946.54,4360 2946.54,4323.46 2970,4300 3070,4300 3120,4350 3170,4350 3195,4325 U14.6@3195,4283.86
NetC50.IN5_2: C6.2 R12.2 U14.2 | length 417.4
  Top Layer w10: R12.2@3017.4,4456.06 R12.2@3017.4,4460
  Top Layer w16: C6.2@3013.46,4360 R12.2@3013.46,4456.06 ; R12.2@3017.4,4460 3047.4,4430 3230,4430 3245,4445 U14.2@3245,4516.14
NetC50.IN6_1: C5.1 U3.6 U13.6 | length 505.6
  Top Layer w10: U3.6@2822.36,4005 U3.6@2850,4005
  Top Layer w16: U3.6@2850,4005 2911.54,4005 C5.1@2946.54,3970 2946.54,3933.46 2970,3910 3070,3910 3120,3960 3170,3960 3195,3935 U13.6@3195,3893.86
NetC50.IN6_2: C5.2 R11.2 U13.2 | length 417.4
  Top Layer w10: R11.2@3017.4,4066.06 R11.2@3017.4,4070
  Top Layer w16: C5.2@3013.46,3970 R11.2@3013.46,4066.06 ; R11.2@3017.4,4070 3047.4,4040 3230,4040 3245,4055 U13.2@3245,4126.14
NetC50.IN7_1: C4.1 U2.6 U12.6 | length 505.6
  Top Layer w10: U2.6@2822.36,3615 U2.6@2850,3615
  Top Layer w16: U2.6@2850,3615 2911.54,3615 C4.1@2946.54,3580 2946.54,3543.46 2970,3520 3070,3520 3120,3570 3170,3570 3195,3545 U12.6@3195,3503.86
NetC50.IN7_2: C4.2 R10.2 U12.2 | length 417.4
  Top Layer w10: R10.2@3017.4,3676.06 R10.2@3017.4,3680
  Top Layer w16: C4.2@3013.46,3580 R10.2@3013.46,3676.06 ; R10.2@3017.4,3680 3047.4,3650 3230,3650 3245,3665 U12.2@3245,3736.14
NetC50.IN8_1: C3.1 U1.6 U11.6 | length 505.6
  Top Layer w10: U1.6@2822.36,3225 U1.6@2850,3225
  Top Layer w16: U1.6@2850,3225 2911.54,3225 C3.1@2946.54,3190 2946.54,3153.46 2970,3130 3070,3130 3120,3180 3170,3180 3195,3155 U11.6@3195,3113.86
NetC50.IN8_2: C3.2 R9.2 U11.2 | length 417.4
  Top Layer w10: R9.2@3017.4,3286.06 R9.2@3017.4,3290
  Top Layer w16: C3.2@3013.46,3190 R9.2@3013.46,3286.06 ; R9.2@3017.4,3290 3047.4,3260 3230,3260 3245,3275 U11.2@3245,3346.14
NetC64_1: C91.1 R107.2 R108.2 R109.2 R110.2 R111.2 U78.6 | length 4384.5
  Top Layer w10: C91.1@6490,6823.46 C91.1@6506.77,6840.24
  Top Layer w20: R107.2@5740,3637.4 v1(5740,4040) ; R108.2@5740,4417.4 v1(5740,4840) ; R109.2@5740,5197.4 v1(5740,5650) ; R111.2@5740,5977.4 v1(5740,6340) ; R110.2@5740,6757.4 5882.6,6900 6440,6900 6490,6850 C91.1@6490,6823.46 ; C91.1@6506.77,6840.24 U78.6@6570,6840.24
  Bottom Layer w16: v1(5740,4040) v1(5740,4490) ; v1(5740,4840) v1(5740,5270) ; v1(5740,5650) v1(5740,6060) ; v1(5740,6340) 5740,6757.4 v1(5806.06,6823.46)
  other v1: 5740,3710
NetC69_1: C90.1 U59.3 U60.3 U61.3 U62.3 U63.3 U64.3 U65.3 U66.3 U67.3 U68.3 U77.6 | length 6538.2
  Top Layer w10: v1(5280,3410) 5280,3610 v1(5290,3620) ; v1(5280,3800) 5280,4000 v1(5290,4010) ; v1(5280,4570) 5280,4780 v1(5290,4790) ; v1(5280,4960) 5280,5170 v1(5290,5180) ; v1(5280,5360) 5280,5560 v1(5290,5570) ; v1(5280,5740) 5280,5950 v1(5290,5960) ; v1(5290,4200) v1(5290,4400) ; v1(5380,3240) 5380,3250 5397.2,3267.2 U59.3@5438.31,3267.2 ; v1(5380,3630) 5407.2,3657.2 U60.3@5438.31,3657.2 ; v1(5380,4020) 5407.2,4047.2 U61.3@5438.31,4047.2 ; v1(5380,4410) 5407.2,4437.2 U62.3@5438.31,4437.2 ; v1(5380,4800) 5380,4810 5397.2,4827.2 U63.3@5438.31,4827.2 ; v1(5380,5190) 5407.2,5217.2 U64.3@5438.31,5217.2 ; v1(5380,5580) 5380,5590 5397.2,5607.2 U65.3@5438.31,5607.2 ; v1(5380,5970) 5407.2,5997.2 U66.3@5438.31,5997.2 ; v1(5380,6360) 5380,6370 5397.2,6387.2 U67.3@5438.31,6387.2 ; v1(5380,6750) 5407.2,6777.2 U68.3@5438.31,6777.2
  Top Layer w20: v1(5290,6350) 5280,6340 v1(5280,6160) 5290,6150 5440,6150 5460,6170 v1(5650,6170) ; C90.1@6480,6293.46 6496.77,6310.24 U77.6@6560,6310.24
  Bottom Layer w16: v1(5280,3410) 5280,3370 5380,3270 v1(5380,3240) ; v1(5280,3800) 5290,3790 v1(5290,3620) 5370,3620 v1(5380,3630) ; v1(5280,4570) 5290,4560 v1(5290,4400) 5300,4410 v1(5380,4410) ; v1(5280,4960) 5290,4950 v1(5290,4790) 5370,4790 v1(5380,4800) ; v1(5280,5360) 5290,5350 v1(5290,5180) 5300,5190 v1(5380,5190) ; v1(5280,5740) 5290,5730 v1(5290,5570) 5370,5570 v1(5380,5580) ; v1(5280,6160) 5290,6150 v1(5290,5960) 5370,5960 v1(5380,5970) ; v1(5290,4200) v1(5290,4010) 5370,4010 v1(5380,4020) ; v1(5380,6360) 5370,6350 v1(5290,6350) 5290,6530 5310,6550 5340,6550 5340,6710 v1(5380,6750) ; v1(5650,6170) 5770,6170 5780,6160 6369.76,6160 v1(6520,6310.24)
NetJP2_1: JP2.1 R115.1 U80.4 | length 2427.6
  Top Layer w12: R115.1@7300,5162.6 7362.6,5162.6 7390,5190 7600,5190 7660,5130 v1(7660,4510) ; v1(7850,3900) 7850,3630 JP2.1@7900,3580
  Top Layer w16: U80.4@7170,4950 7180,4950 7180,5090 7240,5150 7300,5150 R115.1@7300,5162.6
  Bottom Layer w8: v1(7660,4510) 7660,4330 7570,4240 7570,4180 v1(7850,3900)
NetJP2_2: JP2.2 U81.33 U81.35 | length 471
  Top Layer w10: v1(7580,3580) 7584.8,3575.2 U81.35@7584.8,3462.68
  Top Layer w12: U81.33@7545.43,3462.68 7545.43,3545.43 v1(7580,3580)
  Bottom Layer w8: v1(7580,3580) JP2.2@7800,3580
NetJP2_6: JP2.6 U81.37 | length 565.3
  Top Layer w12: U81.37@7677.32,3535.51 7677.32,3482.68 v1(7690,3470)
  Bottom Layer w8: v1(7690,3470) 7750,3470 7850,3570 7850,3700 7770,3780 JP2.6@7800,3780 JP2.6@7800,3760
NetL1_1: L1.1 POWER-A1.4 | length 203.4
  Top Layer w30: L1.1@7230,6190 7319.29,6190 POWER-A1.4@7400,6109.29
NetL2_1: L3.1 POWER-A1.1 | length 181.9
  Top Layer w30: L3.1@7249,6680 7325.35,6680 POWER-A1.1@7400,6605.35
NetL3_2: L2.2 R112.1 | length 129.8
  Top Layer w30: R112.1@6715.12,6440 L2.2@6844.88,6440
NetO1_5: O1.5 U81.52 | length 1083.5
  Top Layer w12: O1.5@7340,3138.9 7398.9,3138.9 7490,3230 7640,3230 7750,3340 7750,3810 7729.21,3830.79 U81.52@7677.32,3830.79
  Top Layer w20: O1.5@7340,3138.9 7378.9,3138.9
NetO2_1: O2.1 R116.1 | length 193.5
  Top Layer w16: R116.1@7400,4697.4 7432.6,4730 O2.1@7580,4730
NetO2_2: O2.2 R113.1 U84.3 | length 464.3
  Top Layer w16: U84.3@7250,4580 7250,4520 7260,4510 7330,4510 7342.6,4497.4 7447.4,4497.4 O2.2@7580,4630 O2.2@7590,4630
NetO3_1: O3.1 R118.2 | length 193.5
  Top Layer w16: R118.2@7400,5097.4 7432.6,5130 O3.1@7580,5130
NetR6_1: R118.1 U81.98 | length 989.9
  Top Layer w10: U81.98@7112.36,4297.32 7112.36,4337.64 7080,4370 7080,4840 7130,4890 7320,4890 7400,4970 R118.1@7400,5022.6
  Top Layer w16: R118.1@7392.6,5022.6 R118.1@7400,5022.6
NetR9.AA1_1: R76.1 R86.1 U58.15 | length 307.7
  Top Layer w16: U58.15@4928.94,6843.98 4993.98,6843.98 5007.4,6857.4 R76.1@5140,6857.4 5142.6,6860 R86.1@5230,6860
NetR9.AA2_1: R75.1 R85.1 U57.15 | length 307.7
  Top Layer w16: U57.15@4928.94,6453.98 4993.98,6453.98 5007.4,6467.4 R75.1@5140,6467.4 5142.6,6470 R85.1@5230,6470
NetR9.AA3_1: R74.1 R84.1 U56.15 | length 307.7
  Top Layer w16: U56.15@4928.94,6063.98 4993.98,6063.98 5007.4,6077.4 R74.1@5140,6077.4 5142.6,6080 R84.1@5230,6080
NetR9.AA4_1: R73.1 R83.1 U55.15 | length 307.7
  Top Layer w16: U55.15@4928.94,5673.98 4993.98,5673.98 5007.4,5687.4 R73.1@5140,5687.4 5142.6,5690 R83.1@5230,5690
NetR9.AA5_1: R72.1 R82.1 U54.15 | length 307.7
  Top Layer w16: U54.15@4928.94,5283.98 4993.98,5283.98 5007.4,5297.4 R72.1@5140,5297.4 5142.6,5300 R82.1@5230,5300
NetR9.AA6_1: R71.1 R81.1 U53.15 | length 307.7
  Top Layer w16: U53.15@4928.94,4893.98 4993.98,4893.98 5007.4,4907.4 R71.1@5140,4907.4 5142.6,4910 R81.1@5230,4910
NetR9.AA7_1: R70.1 R80.1 U52.15 | length 307.7
  Top Layer w16: U52.15@4928.94,4503.98 4993.98,4503.98 5007.4,4517.4 R70.1@5140,4517.4 5142.6,4520 R80.1@5230,4520
NetR9.AA8_1: R69.1 R79.1 U51.15 | length 307.7
  Top Layer w16: U51.15@4928.94,4113.98 4993.98,4113.98 5007.4,4127.4 R69.1@5140,4127.4 5142.6,4130 R79.1@5230,4130
NetR9.AA9_1: R68.1 R78.1 U50.15 | length 307.7
  Top Layer w16: U50.15@4928.94,3723.98 4993.98,3723.98 5007.4,3737.4 R68.1@5140,3737.4 5142.6,3740 R78.1@5230,3740
NetR9.AA10_1: R67.1 R77.1 U49.15 | length 307.7
  Top Layer w16: U49.15@4928.94,3333.98 4993.98,3333.98 5007.4,3347.4 R67.1@5140,3347.4 5142.6,3350 R77.1@5230,3350
NetR11.AA1_2: R35.2 R36.1 R56.1 U58.2 | length 467.1
  Top Layer w10: R36.1@4434.43,6874.43 4410,6850 4410,6727.4 R35.2@4440,6697.4
  Top Layer w16: R36.1@4434.43,6874.43 4440,6880 4457.4,6880 R36.1@4460,6877.4 ; R36.1@4470,6880 4580,6880 4616.02,6843.98 U58.2@4671.06,6843.98 ; R56.1@4560,6877.4 R56.1@4582.6,6877.4
NetR11.AA2_2: R33.2 R34.1 R54.1 U57.2 | length 476
  Top Layer w12: R33.2@4440,6307.4 4410,6337.4 4410,6460 4437.4,6487.4 R34.1@4460,6487.4
  Top Layer w16: R33.2@4432.6,6307.4 R33.2@4440,6307.4 ; R34.1@4457.4,6490 R34.1@4460,6487.4 ; R34.1@4470,6490 4580,6490 4616.02,6453.98 U57.2@4671.06,6453.98 ; R54.1@4560,6487.4 R54.1@4582.6,6487.4
NetR11.AA3_2: R31.2 R32.1 R52.1 U56.2 | length 474.5
  Top Layer w16: R31.2@4432.6,5917.4 R31.2@4440,5917.4 4410,5947.4 4410,6070 4440,6100 4457.4,6100 R32.1@4460,6097.4 ; R32.1@4470,6100 4580,6100 4616.02,6063.98 U56.2@4671.06,6063.98 ; R52.1@4560,6097.4 R52.1@4582.6,6097.4
NetR11.AA4_2: R29.2 R30.1 R50.1 U55.2 | length 474.5
  Top Layer w16: R29.2@4432.6,5527.4 R29.2@4440,5527.4 4410,5557.4 4410,5680 4440,5710 4457.4,5710 R30.1@4460,5707.4 ; R30.1@4470,5710 4580,5710 4616.02,5673.98 U55.2@4671.06,5673.98 ; R50.1@4560,5707.4 R50.1@4582.6,5707.4
NetR11.AA5_2: R27.2 R28.1 R48.1 U54.2 | length 473.1
  Top Layer w16: R27.2@4432.6,5137.4 R27.2@4440,5137.4 4411.69,5165.72 4411.69,5291.69 4440,5320 4457.4,5320 R28.1@4460,5317.4 ; R28.1@4470,5320 4580,5320 4616.02,5283.98 U54.2@4671.06,5283.98 ; R48.1@4560,5317.4 R48.1@4582.6,5317.4
NetR11.AA6_2: R25.2 R26.1 R46.1 U53.2 | length 474.5
  Top Layer w16: R25.2@4432.6,4747.4 R25.2@4440,4747.4 4410,4777.4 4410,4900 4440,4930 4457.4,4930 R26.1@4460,4927.4 ; R26.1@4470,4930 4580,4930 4616.02,4893.98 U53.2@4671.06,4893.98 ; R46.1@4560,4927.4 R46.1@4582.6,4927.4
NetR11.AA7_2: R23.2 R24.1 R44.1 U52.2 | length 443.4
  Top Layer w12: R23.2@4440,4357.4 4410,4387.4 4410,4500 R24.1@4440,4530
  Top Layer w16: R23.2@4432.6,4357.4 R23.2@4440,4357.4 ; R24.1@4470,4540 4580,4540 4616.02,4503.98 U52.2@4671.06,4503.98 ; R44.1@4560,4537.4 R44.1@4582.6,4537.4
NetR11.AA8_2: R21.2 R22.1 R42.1 U51.2 | length 474.5
  Top Layer w16: R21.2@4432.6,3967.4 R21.2@4440,3967.4 4410,3997.4 4410,4120 4440,4150 4457.4,4150 R22.1@4460,4147.4 ; R22.1@4470,4150 4580,4150 4616.02,4113.98 U51.2@4671.06,4113.98 ; R42.1@4560,4147.4 R42.1@4582.6,4147.4
NetR11.AA9_2: R19.2 R20.1 R40.1 U50.2 | length 474.5
  Top Layer w16: R19.2@4432.6,3577.4 R19.2@4440,3577.4 4410,3607.4 4410,3730 4440,3760 4457.4,3760 R20.1@4460,3757.4 ; R20.1@4470,3760 4580,3760 4616.02,3723.98 U50.2@4671.06,3723.98 ; R40.1@4560,3757.4 R40.1@4582.6,3757.4
NetR11.AA10_2: R17.2 R18.1 R38.1 U49.2 | length 474.5
  Top Layer w16: R17.2@4432.6,3187.4 R17.2@4440,3187.4 4410,3217.4 4410,3340 4440,3370 4457.4,3370 R18.1@4460,3367.4 ; R18.1@4470,3370 4580,3370 4616.02,3333.98 U49.2@4671.06,3333.98 ; R38.1@4560,3367.4 R38.1@4582.6,3367.4
NetR12.AA1_2: R55.2 R66.2 R76.2 U58.11 | length 596.5
  Top Layer w16: R55.2@4657.4,6620 4760,6620 4810,6670 4810,6720 4831.61,6741.61 5020.98,6741.61 R66.2@5040,6722.6 5082.6,6722.6 5140,6780 R76.2@5140,6782.6
NetR12.AA2_2: R53.2 R65.2 R75.2 U57.11 | length 596.5
  Top Layer w16: R53.2@4657.4,6230 4760,6230 4810,6280 4810,6330 4831.61,6351.61 5020.98,6351.61 R65.2@5040,6332.6 5082.6,6332.6 5140,6390 R75.2@5140,6392.6
NetR12.AA3_2: R51.2 R64.2 R74.2 U56.11 | length 596.5
  Top Layer w16: R51.2@4657.4,5840 4760,5840 4810,5890 4810,5940 4831.61,5961.61 5020.98,5961.61 R64.2@5040,5942.6 5082.6,5942.6 5140,6000 R74.2@5140,6002.6
NetR12.AA4_2: R49.2 R63.2 R73.2 U55.11 | length 596.5
  Top Layer w16: R49.2@4657.4,5450 4760,5450 4810,5500 4810,5550 4831.61,5571.61 5020.98,5571.61 R63.2@5040,5552.6 5082.6,5552.6 5140,5610 R73.2@5140,5612.6
NetR12.AA5_2: R47.2 R62.2 R72.2 U54.11 | length 596.5
  Top Layer w16: R47.2@4657.4,5060 4760,5060 4810,5110 4810,5160 4831.61,5181.61 5020.98,5181.61 R62.2@5040,5162.6 5082.6,5162.6 5140,5220 R72.2@5140,5222.6
NetR12.AA6_2: R45.2 R61.2 R71.2 U53.11 | length 596.5
  Top Layer w16: R45.2@4657.4,4670 4760,4670 4810,4720 4810,4770 4831.61,4791.61 5020.98,4791.61 R61.2@5040,4772.6 5082.6,4772.6 5140,4830 R71.2@5140,4832.6
NetR12.AA7_2: R43.2 R60.2 R70.2 U52.11 | length 596.5
  Top Layer w16: R43.2@4657.4,4280 4760,4280 4810,4330 4810,4380 4831.61,4401.61 5020.98,4401.61 R60.2@5040,4382.6 5082.6,4382.6 5140,4440 R70.2@5140,4442.6